# Altium PCB PCB_layout.PcbDoc
Units mil, origin at the board's own origin, x right, y up, seen from the top; angles counter-clockwise.
Board outline 3130 x 2090 mil, 2 copper layers (Top Layer, Bottom Layer); 28 components, 22 nets, 78 pads, 9 vias.
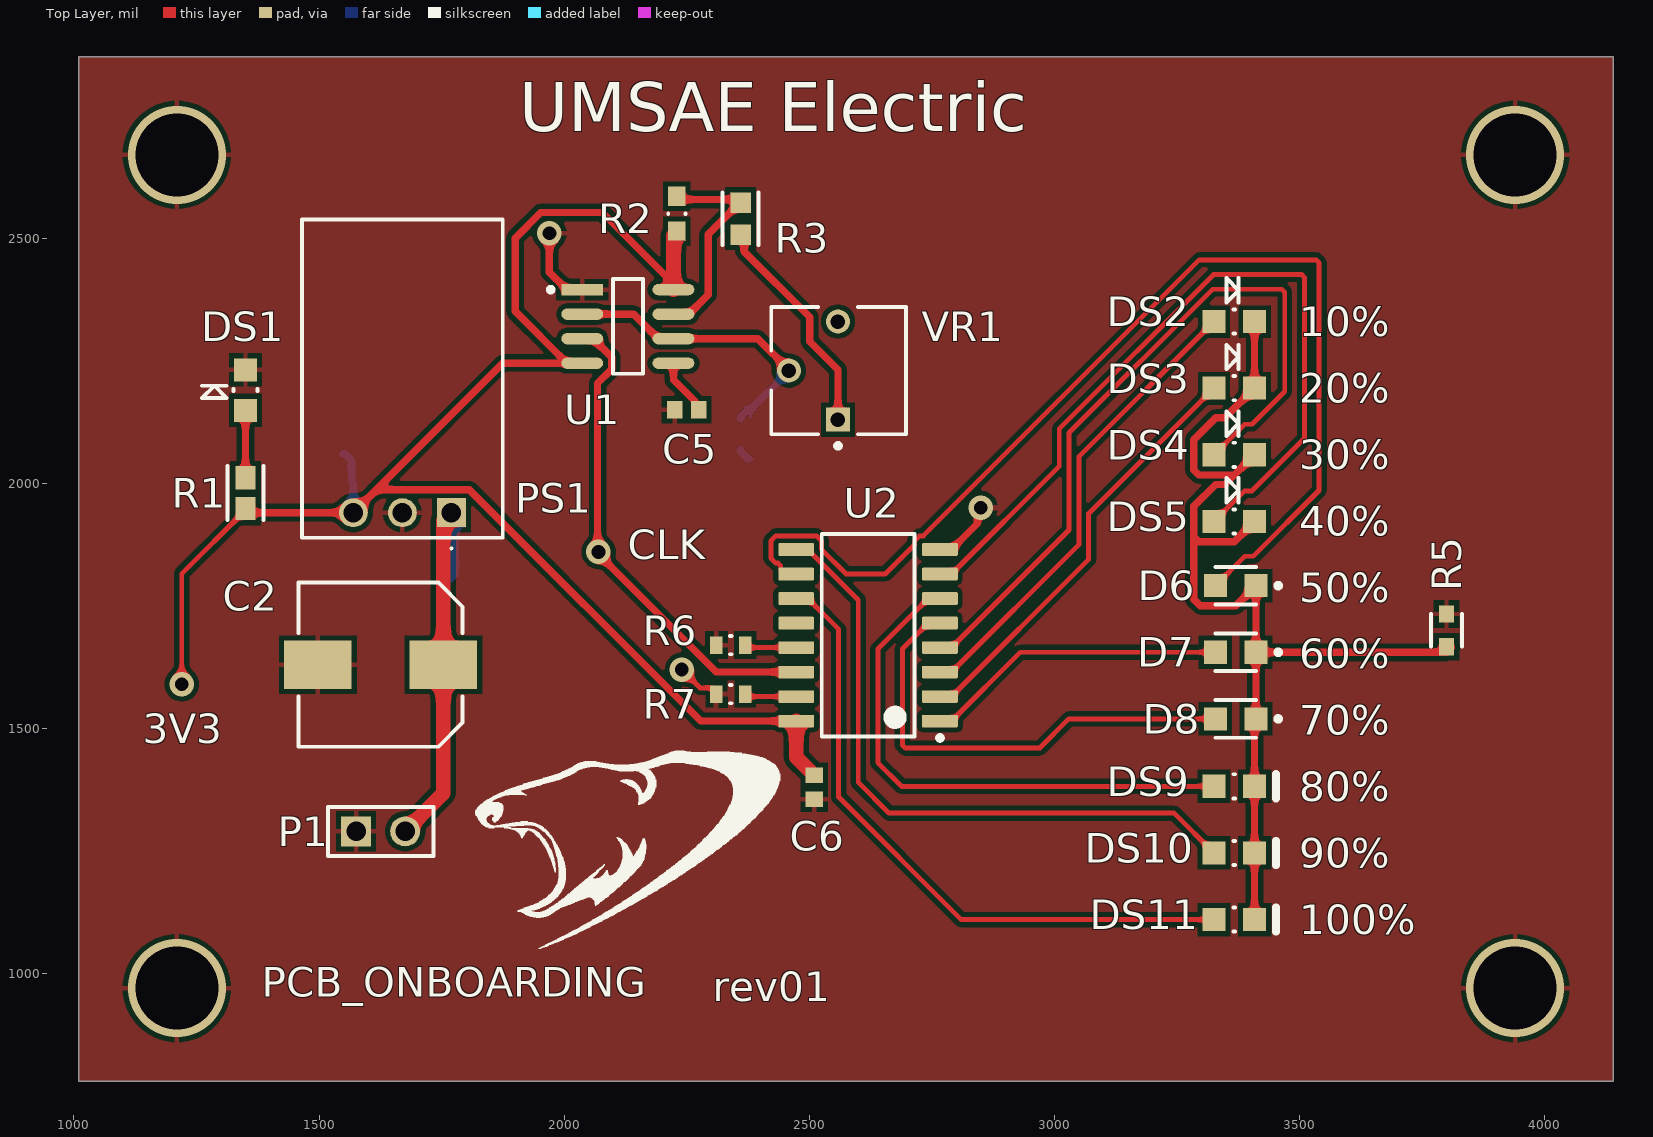
[diagram p0: Top Layer view]
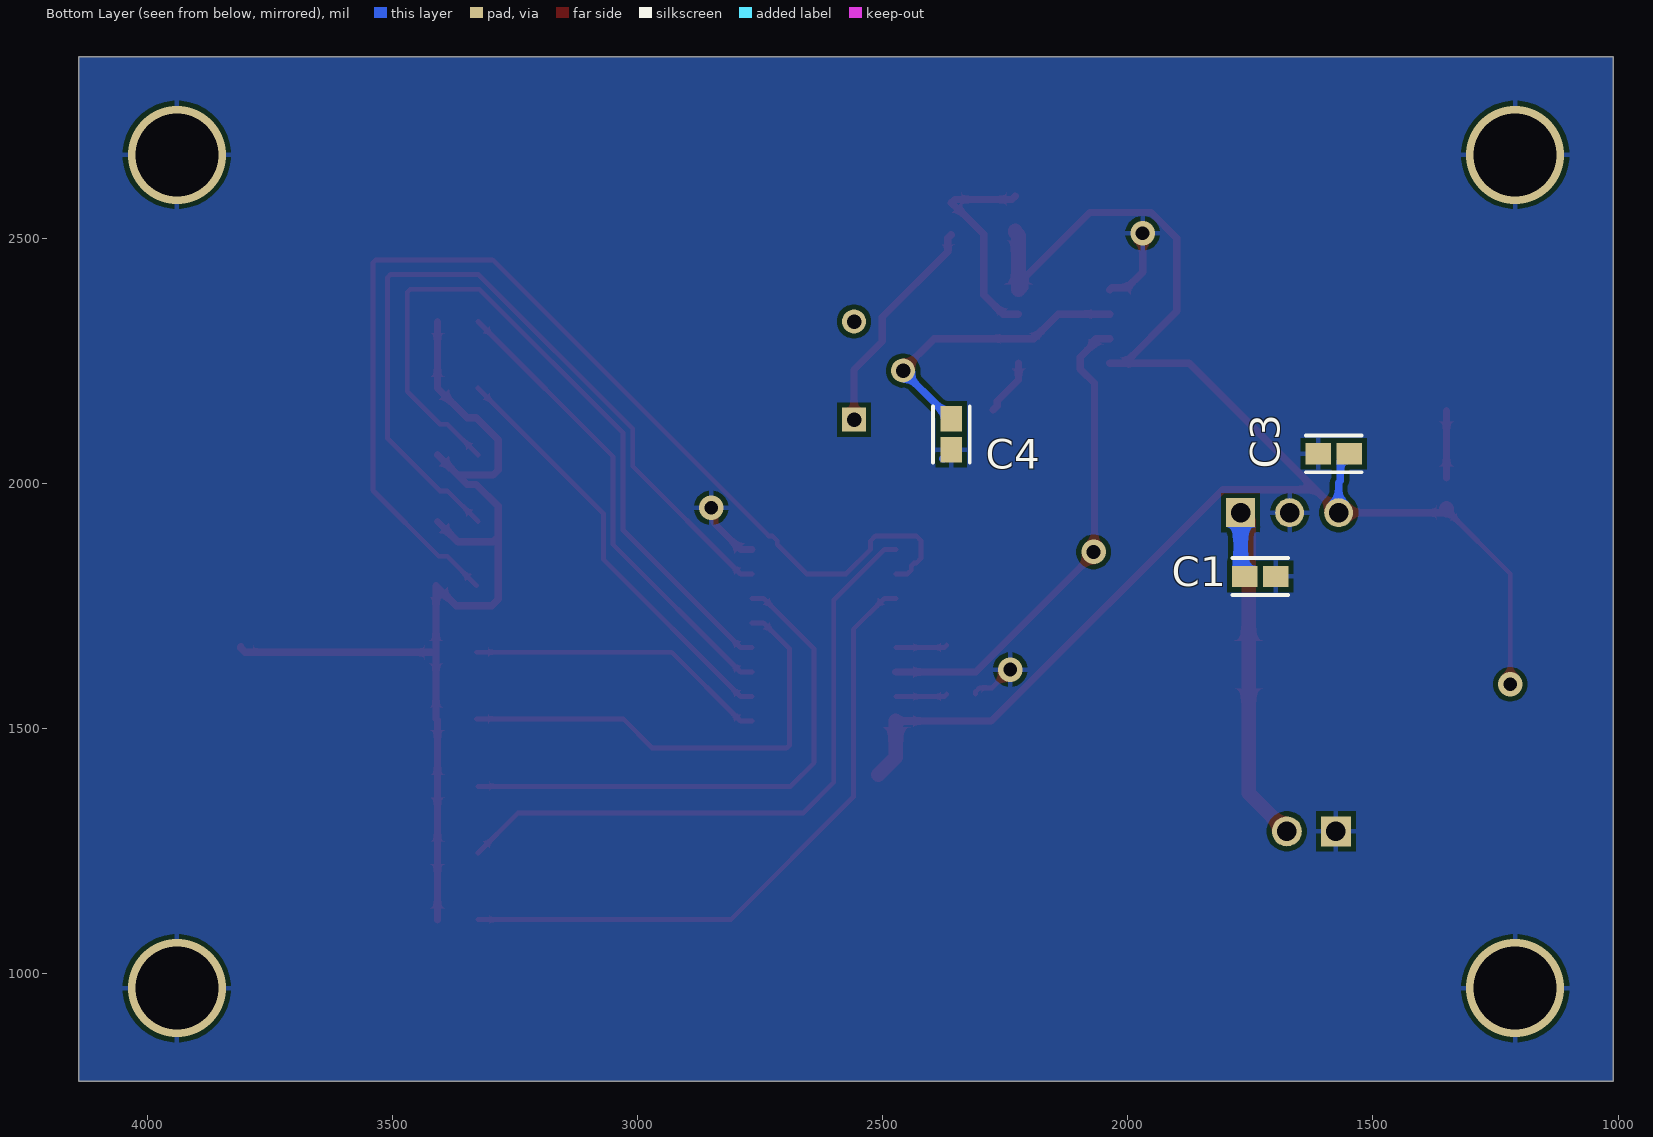
[diagram p1: Bottom Layer view, seen from below]
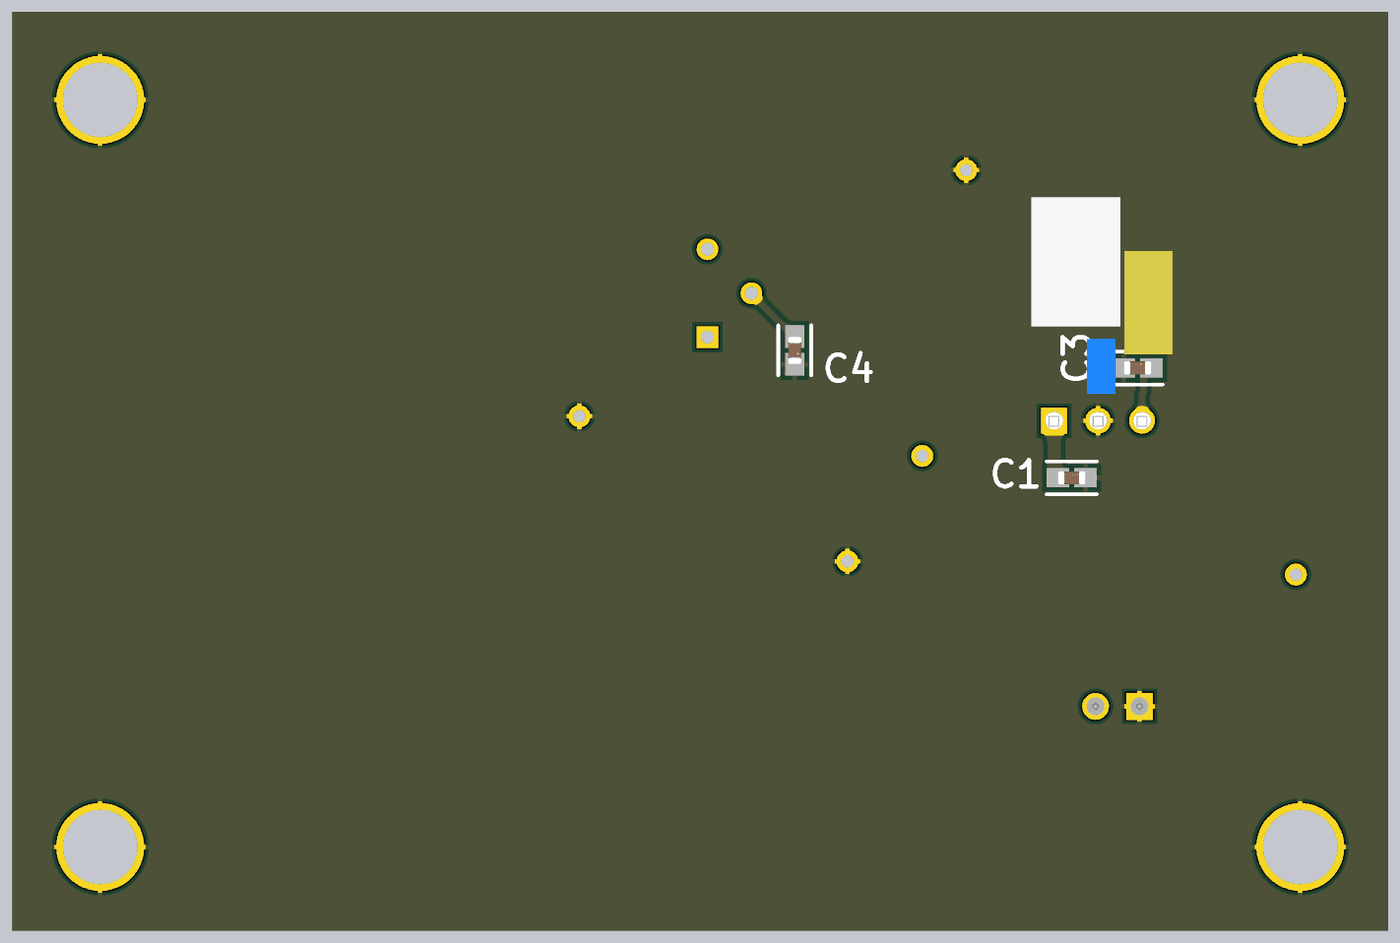
[diagram p2: 3D render of the assembled board from below, using the file's embedded part models]

## Layer stack, top to bottom
Top Solder: solder mask 0.4, Solder Resist, Dk 3.5
Top Layer: signal copper 1.4
Dielectric 1: dielectric 12.6, FR-4, Dk 4.8
Bottom Layer: signal copper 1.4
Bottom Solder: solder mask 0.4, Solder Resist, Dk 3.5

## Board outline
1010,780 4140,780 4140,2870 1010,2870

## Design rules (kind name [scope] priority, off if disabled: settings)
Clearance [All] p1: gap=10 ignorepadtopadclearanceinfootprint=FALSE
HoleSize [All] p1: absolutevalues=TRUE maxlimit=200 minlimit=1 maxpercent=80.000 minpercent=20.000
PolygonConnect [All] p1: connectstyle=Relief reliefconductorwidth=10 reliefentries=4 polygonreliefangle="90 Angle" airgapwidth=10
RoutingVias [All] p1: holewidth=28 width=50 viastyle="Through Hole" minholewidth=28 minwidth=50 maxholewidth=28 maxwidth=50
SolderMaskExpansion [All] p1: expansion=4 istentingtop=FALSE
SupplyNets "Schematic Supply Nets_2" [InNet('VCC')] p1: voltage=0.000
SupplyNets "Schematic Supply Nets_1" [InNet('GND')] p2: voltage=0.000
SupplyNets "Schematic Supply Nets" [InNet('+12')] p3: voltage=0.000
Width [All] p1: maxlimit=30 minlimit=10 preferedwidth=10 minimp=50.000000 maximp=50.000000 favimp=50.000000
29 further rules are at their usual default settings.

## Classes and differential pairs
component class Decade_counter: C4 C5 C6 D6 D7 D8 DS2 DS3 DS4 DS5 DS9 DS10 DS11 R2 R3 R5 R6 R7 U1 U2 VR1
component class Power: C1 C2 C3 DS1 P1 PS1 R1

## Components (designator, comment, footprint, x,y, rotation, side; value= is the part's Value field where it differs from the comment)
C1 "GRM188C81C106MA73J" FP-GRM188-0_2-IPC_A 1730,1810 r180 bottom
C2 "UUD1H101MNL1GS" NIC-CAPA2-8X10_V 1625.71,1630 r180 top
C3 "GRM188C81C106MA73J" FP-GRM188-0_2-IPC_A 1580,2060 r180 bottom
C4 "GRM188C81C106MA73J" FP-GRM188-0_2-IPC_A 2360,2100 r270 bottom
C5 "C0603S103K4RACTU" CAPC1608X87X35LL15T15 2250,2150 r0 top value=0.01uF
C6 "C0603S103K4RACTU" CAPC1608X87X35LL15T15 2510,1380 r90 top value=0.01uF
D6 "LTST-C170YKT" FP-LTST-C170YKT-MFG 3370,1791.21 r180 top
D7 "LTST-C170YKT" FP-LTST-C170YKT-MFG 3370,1655.28 r180 top
D8 "LTST-C170YKT" FP-LTST-C170YKT-MFG 3370,1519.36 r180 top
DS1 "LTST-C170GKT" LTST-C170GKT_V 1350,2190 r90 top
DS2 "LTST-C170GKT" LTST-C170GKT_V 3367.05,2330 r0 top
DS3 "LTST-C170GKT" LTST-C170GKT_V 3367.05,2194.07 r0 top
DS4 "LTST-C170GKT" LTST-C170GKT_V 3367.05,2058.14 r0 top
DS5 "LTST-C170GKT" LTST-C170GKT_V 3367.05,1922.22 r0 top
DS9 "LTST-C170KRKT" LTST-C170KRKT_V 3367.05,1381.85 r0 top
DS10 "LTST-C170KRKT" LTST-C170KRKT_V 3367.05,1245.93 r0 top
DS11 "LTST-C170KRKT" LTST-C170KRKT_V 3367.05,1110 r0 top
P1 "TSW-102-26-F-S" SMTC-TSW-102-26-XX-S 1575.71,1290 r0 top
PS1 "OKI-78SR-3.3_1.5-W36H-C" OKI78SR3315W36HC 1770,1940 r0 top
R1 "RMCF0603FG82R0" FP-RMCF0603-IPC_A 1350,1980 r270 top value=82R
R2 "RP73PF1J1K0BTDF" FP-RP73P-1J-MFG 2230,2550 r90 top value=1KΩ
R3 "MCT0603MD1002DP500" FP-MCT0603-IPC_A 2360,2540 r270 top
R5 "RT0603FRE07162RL" FP-RT0603-MFG 3800,1700 r90 top value=162Ω
R6 "ERJ-S030R00V" FP-ERJS03-MFG 2340,1670 r0 top
R7 "ERJ-S030R00V" FP-ERJS03-MFG 2340,1570 r0 top
U1 "TLC555CDR" FP-D0008A-IPC_B 2130,2320 r0 top
U2 "CD4017BNSR" NS0016A_M 2620,1690 r180 top
VR1 "3362P-1-104LF" BOUR-3362P 2560,2230 r90 top

## Footprints (in the part's own frame and the unit in brackets; to place one, negate y for a bottom-side part, rotate by r counter-clockwise, add the part's x,y. Pads: shape width x height; smd on the part's side, far side on the other; paste and mask are expansions set on the pad)
BOUR-3362P [mm] "THD, 3-Leads, Body 6.6x6.99mm, Pitch 2.54mm"
  rect 1.25x1.25 hole 0.75: 1(-2.54,0.035)
  round 1.25 hole 0.75: 2(0,2.575) 3(2.54,0.035)
  silkscreen extent -4.02,-3.49 3.3,3.5, body extent -3.3,-3.49 3.3,3.49, height 4.95
CAPC1608X87X35LL15T15 [mm] "Chip Capacitor, 2-Leads, Body 1.60x0.80mm, IPC High Density"
  rect 0.8x0.9 smd: 1(-0.625,0) 2(0.625,0)
  body extent -0.87,-0.48 0.87,0.48, height 0.87
FP-D0008A-IPC_B [mil]
  rect 85.4x22.92 smd paste+0 mask+0: 1(-93.06,75)
  rrect100% 85.4x22.92 smd paste+0 mask+0: 2(-93.06,25) 3(-93.06,-25) 4(-93.06,-75) 5(93.06,-75) 6(93.06,-25) 7(93.06,25) 8(93.06,75)
  silkscreen extent -162,-97 31,97, body extent -146,-106 146,106, height 10
FP-ERJS03-MFG [mm]
  rect 0.65x0.9 smd paste+0 mask+0: 1(-0.75,0) 2(0.75,0)
  silkscreen extent -0.05,-0.48 0.05,0.48, body extent -1.17,-0.58 1.17,0.58, height 0.25
FP-GRM188-0_2-IPC_A [mil]
  rect 51.38x43.55 smd paste+0 mask+0: 1(-31.52,0) 2(31.52,0)
  silkscreen extent -57,-38 57,38, body extent -31,-16 31,16, height 39
FP-LTST-C170YKT-MFG [mm]
  rect 1.2x1.2 smd paste+0 mask+0: 1(-1.05,0) 2(1.05,0)
  silkscreen extent -2.33,-0.97 1.05,0.97, body extent -1.75,-0.77 1.75,0.77, height 0.25
FP-MCT0603-IPC_A [mil]
  rect 41.88x41.82 smd paste+0 mask+0: 1(-32.65,0) 2(32.65,0)
  silkscreen extent -54,-37 54,37, body extent -73,-41 73,41, height 10
FP-RMCF0603-IPC_A [mil]
  rect 47.48x41.66 smd paste+0 mask+0: 1(-31.54,0) 2(31.54,0)
  silkscreen extent -55,-37 55,37, body extent -75,-41 75,41, height 10
FP-RP73P-1J-MFG [mm]
  rect 1x0.9 smd paste+0 mask+0: 1(-0.9,0) 2(0.9,0)
  silkscreen extent -0.03,-0.45 0.03,0.45, body extent -1.5,-0.55 1.5,0.55, height 0.25
FP-RT0603-MFG [mm]
  rect 0.9x0.8 smd paste+0 mask+0: 1(-0.85,0) 2(0.85,0)
  silkscreen extent -0.85,-0.81 0.86,0.8, body extent -1.4,-0.55 1.4,0.55, height 0.25
LTST-C170GKT_V [mm] "SMD, 2-Leads, Body 2x1.25mm"
  rect 1.2x1.2 smd: 1(-1.05,0) 2(1.05,0)
  silkscreen extent -0.41,-0.63 0.23,2.25, body extent -1,-0.63 1,0.63, height 1.1
LTST-C170KRKT_V [mm] "SMD, 2-Leads, Body 2x1.25mm"
  rect 1.2x1.2 smd: 1(-1.05,0) 2(1.05,0)
  silkscreen extent -0.05,-0.64 2.16,0.64, body extent -1,-0.63 1,0.63, height 1.2
NIC-CAPA2-8X10_V [mm] "Aluminum Electrolytic Capacitor, Diameter 8mm, Height 10.8mm, Pitch 6.5mm"
  rect 3.5x2.5 smd: 1(-3.25,0) 2(3.25,0)
  silkscreen extent -4.25,-4.25 4.25,4.25, body extent -3.99,-3.97 3.99,4, height 10.8
NS0016A_M [mm] "SOIC,16-Leads,Body 10.5x5.6mm,Pitch 1.27mm,IPC Low Density"
  rrect15% 1.85x0.65 smd: 1(-3.725,4.445) 2(-3.725,3.175) 3(-3.725,1.905) 4(-3.725,0.635) 5(-3.725,-0.635) 6(-3.725,-1.905) 7(-3.725,-3.175) 8(-3.725,-4.445) 9(3.725,-4.445) 10(3.725,-3.175) 11(3.725,-1.905) 12(3.725,-0.635) 13(3.725,0.635) 14(3.725,1.905) 15(3.725,3.175) 16(3.725,4.445)
  silkscreen extent -3.85,-5.25 2.4,5.44, body extent -2.8,-5.25 2.8,5.25, height 2
OKI78SR3315W36HC [mm]
  rect 1.5x1.5 hole 1: 1(0,0)
  round 1.5 hole 1: 2(-2.54,0) 3(-5.08,0)
  silkscreen extent -7.74,-1.9 2.66,15.2, body extent -7.74,-1.31 2.67,15.2, height 11.48
SMTC-TSW-102-26-XX-S [mm] ".025 SQ Post Terminal Strip Assembly, 1x2 Pins, Vertical, 2.54mm Pitch, Male"
  rect 1.55x1.55 hole 1.02: 1(0,0)
  round 1.55 hole 1.02: 2(2.54,0)
  silkscreen extent -1.46,-1.27 4,1.27, body extent -1.4,-1.27 3.81,1.27, height 8.38

## Part data
C1 C3 C4: library part CMP-06035-041220-1, "Chip Multilayer Ceramic Capacitors for General Purpose, 0603, 10uF, X6S, 22%, 20%, 16V", Capacitance=10uF, Case/Package=0603, Dielectric=X6S, Max Operating Temperature=105°C, Min Operating Temperature=-55°C, Package Quantity=10000, Tolerance=20%, Voltage Rating=16V, Length=0.063inch, Mount="Surface Mount", Packaging="Tape and Reel", Thickness=0.039inch, Voltage Rating (DC)=16V, Weight=0.000222oz, Width=0.031inch
C2: library part CMP-0687-00073-1, "Aluminum Electrolytic Capacitor, UD Series, Low Impedance, 100 uF, 50 V, + / - 20%, -55 to 105 degC, Chip Type, 8 x 10 mm D x L, Pb-Free, Reel", Capacitance=100µF, ESR (Equivalent Series Resistance)=-, Lifetime @ Temp.="5000 Hrs @ 105°C", Manufacturer=Nichicon, Operating Temperature="-55°C ~ 105°C", Package / Case="Radial, Can - SMD", Rated Capacitance="100 uF", Rated Ripple Current (at 100kHz)="300 mA", Rated Voltage="50 V", Ripple Current=300mA, Supplier Part Number 1=493-2306-1-ND, Tolerance=±20%, Tolerance Rated Capacitance="-20 to 20%", Voltage Rating=50V, Applications="General Purpose", Category=Capacitors, ComponentLink1Description="Manufacturer URL", ComponentLink1URL=http://www.nichicon.co.jp/, ComponentLink2Description=Datasheet, ComponentLink2URL=http://products.nichicon.co.jp/en/pdf/XJA043/e-ud.pdf, ComponentLink3Description="Package Specification", ComponentLink3URL=http://products.nichicon.co.jp/en/pdf/XJA043/e-ud.pdf, ComponentLink4Description=http://nichicon-us.com/english/products/pdfs/e-uud.pdf, ComponentLink4URL=http://nichicon-us.com/english/products/pdfs/e-uud.pdf, DatasheetVersion=08/2012, Diameter="8 mm", Endurance Time="5000 h", Height - Seated (Max)="0.394\" (10.00mm)", Impedance="0.34 Ohm", Lead Spacing=-, Length="10 mm", Manufacturer Part Number=UUD1H101MNL1GS, Mounting Technology="Surface Mount", Mounting Type="Surface Mount", PackageDescription="2-Pin Surface Mount Device, Diameter 8 mm, Height 10 mm, Pitch 6.5 mm", PackageReference=CAPAE-D8H10, Packaging="Cut Tape (CT)", Packing="Dia382mm Reel", Part Status=Active, PartNumber=UUD1H101MNL1GS, Polarization=Polar, Pricing 1="1=0.92, 10=0.685, 25=0.5868, 50=0.5478, 100=0.4696, 250=0.43044 (CAD)", RoHS=TRUE, Size / Dimension="0.315\" Dia (8.00mm)", Stock 1=65948, Supplier 1=Digi-Key, Surface Mount Land Size="0.327\" L x 0.327\" W (8.30mm x 8.30mm)"
C5 C6: library part CMP-2006-03842-1, Manufacturer=Kemet, Part Number=C0603S103K4RACTU
D6 D7 D8: library part CMP-1674-00003-7, "LED YELLOW CLEAR SMD", Case Code (Imperial)=0805, Case Code (Metric)=2012, Color=Yellow, Forward Current=20mA, Forward Voltage=2.1V, Lens Color=Colorless, Max Operating Temperature=85°C, Min Operating Temperature=-55°C, Package Quantity=1, Power Dissipation=60mW, Reverse Voltage=5V, Test Current=10mA, Case/Package=0805, Depth=1.6mm, Dominant Wavelength=588nm, Height=1.1mm, Illumination Color=Yellow, Lead Free="Lead Free", Length=3.2mm, Lens Style=Diffused, Lens Transparency=Clear, Luminous Intensity=6mcd, Mount="Surface Mount", Number of Elements=1, Number of LEDs=1, Number of Pins=2, Packaging="Tape and Reel", Power Rating=60mW, Radiation Hardening=No, RoHS Compliant=Yes, Series="CHIPLED 0805", Viewing Angle=130°, Wavelength=585nm, Width=1.25mm
DS1 DS2 DS3 DS4 DS5: library part CMP-1674-00002-5, "LED Uni-Color Green, 100 mW, 120 mA, -55 to 85 degC, 2-Pin SMD, RoHS, Tape and Reel", Color=Green, Current - Test=10mA, Lens Color=Colorless, Manufacturer=Lite-On, Max Operating Temperature="85 degC", Millicandela Rating=6mcd, Min Operating Temperature="-55 degC", Package / Case="0805 (2012 Metric)", Package Quantity=1, Supplier Device Package=-, Supplier Part Number 1=160-1179-1-ND, Voltage - Forward (Vf) (Typ)=2.1V, Category=Optoelectronics, Colour=Green, ComponentLink1Description="Manufacturer URL", ComponentLink1URL=http://www.us.liteon.com/, ComponentLink2Description=Datasheet, ComponentLink2URL=http://media.digikey.com/pdf/Data%20Sheets/Lite-On%20PDFs/LTST-C170GKT.pdf, DatasheetVersion=03/2003, Features=-, Height="1.1 mm", Height (Max)=1.10mm, Length="2 mm", Lens Style/Size="Rectangle with Flat Top, 1.40mm x 1.25mm", Lens Transparency=Clear, Manufacturer Part Number=LTST-C170GKT, Mount="Surface Mount", Mounting Technology="Surface Mount", Mounting Type="Surface Mount", PackageDescription="2-Pin Surface Mount Device, Body 2 x 1.25 mm", PackageReference=C170GKT, Packaging="Tape and Reel", Part Status=Active, Pins=2, Pricing 1="1=0.48, 10=0.351, 25=0.2588, 100=0.1848, 250=0.12564, 500=0.11086, 1000=0.08684 (CAD)", RoHS="RoHS Compliant", RoHSCompliant=true, Size / Dimension="2.00mm L x 1.25mm W", Stock 1=242288, Supplier 1=Digi-Key, Viewing Angle=130°, Wavelength - Dominant=569nm, Wavelength - Peak=565nm
DS9 DS10 DS11: library part CMP-2000-07593-1, "LED Red, 75 mW, 54 mcd, -55 to 85 degC, 2-Pin SMD, RoHS, Tape and Reel", Case Code (Imperial)=0805, Case Code (Metric)=2012, Colour=Red, Forward Current=30mA, Forward Voltage=2V, Lens Colour=Colorless, Manufacturer=Lite-On, Max Operating Temperature=85degC, Min Operating Temperature=-55degC, Package Description="2-Pin Surface Mount Device, Body 2 x 1.25 mm", Package Quantity=1, Package Reference=C170KRKT, Power Dissipation=75mW, Test Current=20mA, Case\/Package=0805, Datasheet URL=http://optoelectronics.liteon.com/upload/download/DS-22-99-0150/LTST-C170KRKT.pdf, Datasheet Version="Rev. D, 11/2014", Depth=1.6mm, Dominant Wavelength=631nm, Height=1.1mm, Illumination Colour=Red, Lead Free=LeadFree, Length=3.2mm, Lens Style=Rectangular, Lens Transparency=Clear, Luminous Intensity=54mcd, Manufacturer URL=http://www.us.liteon.com/, Mount=SurfaceMount, Mounting Technology=SurfaceMount, Number of Elements=1, Number of LEDs=1, Number of Pins=2, Packaging=TapeandReel, Power Rating=75mW, Radiation Hardening=No, RoHSCompliant=True, Viewing Angle=130degrees, Wavelength=639nm, Width=1.25mm
P1: library part CMP-1024-00329-1, "0.025\" SQ Post Header, Through-hole, Vertical, -55 to 125 degC, 2.54 mm Pitch, 2-Pin, Male, RoHS", Manufacturer=Samtec, Temperature Range="-55 to 125 degC", ComponentLink1Description="Manufacturer URL", ComponentLink1URL=http://www.samtec.com, ComponentLink2Description=Datasheet, ComponentLink2URL=http://www.samtec.com/documents/webfiles/pdf/TSW_TH.PDF, ComponentLink3Description="Package Specification", ComponentLink3URL=http://www.samtec.com/documents/webfiles/cpdf/TSW-XXX-XX-XXX-X-XX-XXX-MKT.pdf, DatasheetVersion=F-214, Mounting Technology=Through-hole, Orientation=Vertical, PackageDescription=".025[0.64] SQ. Post Terminal Strip Assembly", PackageReference=TSW-102-26-XX-S, PackageVersion="DM, 8/1988", PartNumber=TSW-102-26-F-S, Pitch="2.54 mm", RoHS=True
PS1: "Power Supply", Arrow Part Number=OKI-78SR-3.3/1.5-W36H-C, Manufacturer_Name="Murata Electronics", Mouser Part Number=580-OKI78SR3.31.5WHC, Arrow Price/Stock=https://www.arrow.com/en/products/oki-78sr-3.31.5-w36h-c/murata-power-solutions?utm_currency=USD&region=nac, Datasheet Link=https://www.murata.com/products/productdata/8807037992990/oki-78sr.pdf?1675222286000, Height=8.6mm, Manufacturer_Part_Number=OKI-78SR-3.3/1.5-W36H-C, Mouser Price/Stock=https://www.mouser.co.uk/ProductDetail/Murata-Power-Solutions/OKI-78SR-3.3-1.5-W36H-C?qs=2QmwSASSNhasLT4%252BJlpIag%3D%3D
R1: library part CMP-26527-007395-1, "82Ω ±1% 0.1W 0603 Thick Film Chip Resistor AEC-Q200 compliant", RoHS Compliant=Yes
R2: library part CMP-03211-004517-1, "RES SMD 1K OHM 0.1% 1/6W 0603", Manufacturer="TE Connectivity", Package=RP73P-1J, Power Rating=0.166W, Resistance=1KΩ, Temperature="-55°C to +155°C", Temperature Coefficient=25ppm/°C, Temperature Range High=+155°C, Temperature Range Low=-55°C, Tolerance=0.001, Voltage Rating=100V, Automotive=No, Category=Res, ComponentLink2Description=Datasheet, ComponentLink2URL=https://www.te.com/commerce/DocumentDelivery/DDEController?Action=srchrtrv&DocNm=1773272&DocType=DS&DocLang=English, Composition="Thin Film", Device Class L1="Passive Components", Device Class L2=Resistors, Device Class L3="Chip SMD Resistors", Digikey Description="RES SMD 1K OHM 0.1% 1/6W 0603", Height=0.55mm, Ipc Land Pattern Name=RESC15580X45, Lead Free=Yes, Manufacturer Part Number=RP73PF1J1K0BTDF, Octopart=https://octopart.com/rp73pf1j1k0btdf-te+connectivity-45465729, RoHS=TRUE, Series=RP73P
R3: library part CMP-02407-010942-1, "RES SMD 100 OHM 1% 1/8W 0603", Case Code (Imperial)=0603, Case Code (Metric)=1608, Max Operating Temperature=175°C, Max Power Dissipation=150mW, Min Operating Temperature=-55°C, Package Quantity=1, Power Rating=125mW, Resistance=10kR, Temperature Coefficient=25ppm/°C, Tolerance=0.5%, Voltage Rating=75V, Case/Package=0603, Composition="Thin Film", Contact Plating=Tin, Depth=0.85mm, Features="Automotive AEC-Q200", Height=0.022inch, Lead Free="Lead Free", Length=1.55mm, Military Standard=Not, Mount="Surface Mount", Number of Terminations=2, Packaging="Tape and Reel", REACH SVHC="No SVHC", Termination=Wraparound, Voltage Rating (DC)=75V, Width=0.8mm
R5: library part CMP-03412-027968-1, "RES SMD 162 OHM 1% 1/10W 0603", Manufacturer=Yageo, Package=RT0603, Power Rating=0.1W, Resistance=162Ω, Temperature="-55°C to +155°C", Temperature Coefficient="50 ppm/°C", Temperature Range High=+155°C, Temperature Range Low=-55°C, Tolerance=0.01, Voltage Rating=75V, Automotive=No, Category=Res, ComponentLink2Description=Datasheet, ComponentLink2URL=http://www.yageo.com/documents/recent/PYu-RT_1-to-0.01_RoHS_L_9.pdf, Composition="Thin Film", Device Class L1="Passive Components", Device Class L2=Resistors, Device Class L3="Chip SMD Resistors", Digikey Description="RES SMD 162 OHM 1% 1/10W 0603", Footprint Url=http://www.yageo.com/exep/pages/download/literatures/PYu-R_Mount_10.pdf, Height=0.55mm, Ipc Land Pattern Name=RESC16080X45, Lead Free=Yes, Manufacturer Part Number=RT0603FRE07162RL, Mouser Description="Thin Film Resistors - SMD 1/10W 162 ohm 1% 50ppm", Octopart=https://octopart.com/rt0603fre07162rl-yageo-1483634, RoHS=TRUE, Series=RT
R6 R7: library part CMP-00287-39831190-1, "ERJ-S030R00V Zero Ohm Resistor, Jumper, 0603 [1608 Metric], Thick Film, 100 mW, 1 A, Surface Mount", Case Code (Imperial)=0603, Case Code (Metric)=1608, Max Operating Temperature=155°C, Max Power Dissipation=100mW, Min Operating Temperature=-55°C, Resistance=0Ω, Temperature Coefficient=100ppm/°C, Tolerance=5%, Voltage Rating (DC)=100V, Case/Package=0603, Composition="Thick Film", Contact Plating=Tin, Depth=800µm, Features=Anti-Sulfur, Height=558.8µm, Lead Free="Lead Free", Length=1.6mm, Lifecycle Status=Production, Military Standard=Not, Mount="Surface Mount", NexarPartId=39831190, Number of Terminations=2, Power Rating=100mW, RoHS=Compliant, Width=800µm
U1: library part CMP-04857-000001-1, "IC OSC SGL TIMER 2.1MHZ 8-SOIC", Case/Package=SOIC, Current Rating=250A, Frequency=2.1MHz, High Level Output Current=-10mA, Low Level Output Current=100mA, Max Operating Temperature=125°C, Max Power Dissipation=725mW, Max Supply Voltage=15V, Min Operating Temperature=-40°C, Min Supply Voltage=2V, Operating Supply Current=360uA, Package Quantity=2500, Quiescent Current=250uA, Height=1.58mm, Lead Free="Lead Free", Length=4.9mm, Mount="Surface Mount", Number of Channels=1, Number of Pins=8, Number of Timers/Counters=1, Packaging="Tape and Reel", Power Dissipation=725mW, Radiation Hardening=No, REACH SVHC="No SVHC", Termination=SMD/SMT, Weight=0.002561oz, Width=3.91mm
U2: library part CMP-1623-00606-2, "CMOS Decade Counter with 10 Decoded Outputs, NS0016A, LARGE T&R", F @ Nom Voltage(Max)(Mhz)=8, Generic Part Number=CD4017B, ICC @ Nom Voltage(Max)(mA)=0.03, Manufacturer="Texas Instruments", Operating Temperature Range(C)="-55 to 125", Rating=Military, tpd @ Nom Voltage(Max)(ns)=270, Voltage(Nom)(V)=10, Bits(#)=10, DatasheetVersion=SCHS027C, Function=Counter, Input Type=CMOS, Inputs=1, Output Drive (IOL/IOH)(Max)(mA)=1.5/-1.5, Output Type=CMOS, PackageReference=NS0016A, Schmitt Trigger=No, Technology Family=CD4000, Type=Decade, VCC(Max)(V)=18, VCC(Min)(V)=3
VR1: library part CMP-1747-00003-1, "Square Trimpot(R) Trimming Potentiometer, 100 KOhm, 300 V, -55 to 125 degC, 3-Pin THD, RoHS, Tube", Case\Package=Axial, Max Operating Temperature="155 degC", Min Operating Temperature="-55 degC", Package Quantity=200, Power Rating="250 mW", Resistance="1 mohm", Tolerance=1%, Voltage Rating="250 V", ComponentLink1Description="Manufacturer URL", ComponentLink1URL=http://www.bourns.com/, ComponentLink2Description=Datasheet, ComponentLink2URL=http://www.bourns.com/docs/Product-Datasheets/3362.pdf, DatasheetVersion=May-16, Length="0.248 inch", Mount="Through Hole", PackageDescription="3-Pin Through Hole Device, Body 6.6 x 6.99 mm, Pitch 2.54 mm", PackageReference=3326P, Packaging=Bulk, RoHSCompliant=true

## Via types
v1: diameter 50, hole 28, Top Layer to Bottom Layer, 5 vias
v2: diameter 200, hole 169.29, Top Layer to Bottom Layer, 4 vias

## Nets (pads, with @x,y where several pads share a name; then routed paths per layer and width w, separated by ;. In a path a pad name is that pad's centre, name@x,y a point inside that pad or via, vN(x,y) a via of type N, cw(c..) or ccw(c..) an arc to the next point about the centre after c; other vN are vias at no path point)
+12: C1.1 C2.1 P1.2 PS1.1 | length 823.6
  Top Layer w30: P1.2 1753.66,1367.95 C2.1 1753.66,1923.66 PS1.1
  Bottom Layer w30: C1.1 1763.22,1810 1770,1816.78 PS1.1
GND: C1.2 C2.2 C3.1 C4.2 C5.1 C6.1 DS1.2 P1.1 PS1.2 R5.2 R6.1 R7.1 U1.1 U2.8 | length 416.5
  Top Layer w10: v1(2240,1620) 2277.28,1582.72 2302.68,1582.72 2310.47,1574.92 R7.1
  Top Layer w15: v1(1970,2510) 1970,2430.7 2001.74,2398.96 2032.99,2398.96 U1.1 ; U2.8 2790.28,1865 2843.3,1918.03 2843.3,1943.3 v1(2850,1950)
  Bottom Layer w15: C4.2 2360,2064.57 2374.28,2050.29 C4.2@2378.19,2050.29
  other v2: 1210,970 3940,970 1210,2670 3940,2670
NetC4_1: C4.1 U1.2 U1.6 VR1.2 | length 613.8
  Top Layer w15: U1.2 2141.81,2345 2191.81,2295 U1.6 2395,2295 VR1.2@2460,2230
  Bottom Layer w15: C4.1 2360,2135.43 2374.28,2149.71 2379.71,2149.71 VR1.2@2460,2230
NetC5_2: C5.2 U1.5 | length 116.4
  Top Layer w15: U1.5 2223.06,2211.04 2266.36,2167.74 2266.36,2158.25 C5.2
NetD6_1: D6.1 D7.1 D8.1 DS2.2 DS3.2 DS4.2 DS5.2 DS9.2 DS10.2 DS11.2 R5.1 | length 2190.3
  Top Layer w15: DS11.2 DS10.2 DS9.2 3408.39,1516.4 D8.1 D7.1 ; DS5.2 3367.26,1881.1 3294.84,1881.1 3284.59,1891.35 ; DS4.2 3367.26,2017.02 ; DS2.2 DS3.2 3347.8,2133.48 3329.05,2133.48 3284.59,2089.02 3284.59,2027.27 3294.84,2017.02 3367.26,2017.02 ; R5.1@3810,1666.54 3810,1664.57 3800.72,1655.28 D7.1 ; 3284.59,1891.35 3284.59,1763.29 3297.79,1750.09 3370.22,1750.09 D6.1 D7.1 ; 3284.59,1891.35 3284.59,1953.09 3329.05,1997.56 3347.8,1997.56 3367.26,2017.02
NetD6_2: D6.2 U2.10 | length 2298.8
  Top Layer w10: U2.10 2449.72,1815 2441.93,1822.8 2441.93,1831.35 2436.07,1837.2 2431.84,1837.2 2421.93,1847.12 2421.93,1882.88 2431.84,1892.8 2514.85,1892.8 2524.76,1882.88 2524.76,1865.49 2575.25,1815 2655,1815 2715.24,1875.24 2715.24,1882.88 2725.15,1892.8 2732.8,1892.8 3295.86,2455.86 3534.14,2455.86 3540,2450 3540,1985.37 3405.73,1851.11 3388.56,1851.11 D6.2
NetD7_2: D7.2 U2.1 | length 620.1
  Top Layer w10: U2.1 2790.28,1515 2930.56,1655.28 D7.2
NetD8_2: D8.2 U2.5 | length 960.4
  Top Layer w10: U2.5 2743.03,1715 2690,1661.97 2690,1465.86 2695.86,1460 2970.34,1460 3029.7,1519.36 D8.2
NetDS1_1: DS1.1 R1.1 | length 137.1
  Top Layer w15: R1.1 DS1.1
NetDS2_1: DS2.1 U2.3 | length 960.4
  Top Layer w10: U2.3 2790.28,1615 3050,1874.72 3050,2054.29 DS2.1
NetDS3_1: DS3.1 U2.2 | length 874.5
  Top Layer w10: U2.2 2790.28,1565 3070,1844.72 3070,1938.36 DS3.1
NetDS4_1: DS4.1 U2.4 | length 1525
  Top Layer w10: U2.4 2790.28,1665 3030,1904.72 3030,2102.75 3323.11,2395.86 3464.14,2395.86 3470,2390 3470,2187.23 3403.27,2120.5 3388.07,2120.5 DS4.1
NetDS5_1: DS5.1 U2.7 | length 1626.5
  Top Layer w10: U2.7 2790.28,1815 3010,2034.72 3010,2111.03 3324.83,2425.86 3504.14,2425.86 3510,2420 3510,2091.3 3403.27,1984.57 3388.07,1984.57 DS5.1
NetDS9_1: DS9.1 U2.6 | length 1107
  Top Layer w10: U2.6 2743.03,1765 2640,1661.97 2640,1430 2688.15,1381.85 DS9.1
NetDS10_1: DS10.1 U2.9 | length 1326.7
  Top Layer w10: U2.9 2496.97,1865 2600,1761.97 2600,1390 2662.73,1327.27 3244.36,1327.27 DS10.1
NetDS11_1: DS11.1 U2.11 | length 1324
  Top Layer w10: U2.11 2496.97,1765 2560,1701.97 2560,1360 2810,1110 DS11.1
NetR2_2: R2.2 R3.1 U1.7 | length 438.7
  Top Layer w15: U1.7 2254.3,2345 2293.83,2384.53 2293.83,2507.77 2345.27,2559.21 2346.59,2559.21 R3.1@2360,2572.62 ; R2.2 2236.39,2579.04 2353.61,2579.04 R3.1
NetR3_2: R3.2 VR1.1 | length 459.6
  Top Layer w15: R3.2 2367.31,2500.04 2367.31,2472.69 2500.73,2339.27 2500.73,2289.27 2558.62,2231.38 VR1.1
NetR6_2: R6.2 U2.13 | length 105.9
  Top Layer w10: R6.2 2374.53,1665 U2.13
NetR7_2: R7.2 U2.15 | length 105.9
  Top Layer w10: R7.2 2374.53,1565 U2.15
NetU1_3: U1.3 U2.14 | length 997.4
  Top Layer w15: U1.3 2066.04,2295 2069.7,2291.34 2069.7,2284.44 2097.14,2257 2097.14,2233 2068.19,2204.05 2068.19,1857.03 2310.21,1615 U2.14
  other v1: 2070,1860
VCC: C3.2 C6.2 PS1.3 R1.2 R2.1 U1.4 U1.8 U2.16 | length 3371.9
  Top Layer w10: v1(1220,1590) 1220,1815.55 R1.2@1350,1945.55
  Top Layer w15: R1.2@1355.83,1940 PS1.3 1617.03,1987.03 ; U1.4 U1.4@2005.7,2245 ; U1.8 2213.49,2395 2209.83,2398.66 2209.83,2420.17 2077.5,2552.5 1952.4,2552.5 1900,2500.1 1900,2350.7 U1.4@2005.7,2245 ; U2.16 2278.8,1515 1806.78,1987.03 1617.03,1987.03 ; C6.2@2509.02,1405.59 C6.2@2510,1405.59 ; 1617.03,1987.03 1875,2245 U1.4@2005.7,2245
  Top Layer w30: R1.2@1350,1945.55 R1.2 ; U1.8 2223.06,2505.65 2230,2512.6 R2.1 ; U2.16 2473.35,1441.26 C6.2@2509.02,1405.59
  Bottom Layer w15: C3.2 1552.4,2060 1566.67,2045.72 1566.67,2004.7 1570,2001.37 PS1.3
pads on no net: U2.12 VR1.3

## Polygon pours and split planes (outlines as drawn)
GND on Bottom Layer "GND_L02_P001" (solid, pour order 1): 1010,2870 4140,2870 4140,780 1010,780
GND on Top Layer "GND_L01_P000" (solid, pour order 0): 4140,2870 4140,780 1010,780 1010,2870

## Silkscreen, mask and mechanical layers (free items; w line width, h text height)
Top Overlay:
  region: 6050 vertices and 0 holes, not listed, extent 1819.1,1050.48 2440.42,1454.34
  text "UMSAE Electric" at 1908,2718 h100
  text "10%" at 3500,2300 h60
  text "20%" at 3500,2164.44 h60
  text "30%" at 3500,2028.89 h60
  text "40%" at 3500,1893.33 h60
  text "CLK" at 2130,1845 h60
  text "50%" at 3500,1757.78 h60
  text "60%" at 3500,1622.22 h60
  text "70%" at 3500,1486.67 h60
  text "3V3" at 1140.03,1470 h60
  text "80%" at 3500,1351.11 h60
  text "90%" at 3500,1215.56 h60
  text "100%" at 3500,1080 h60
  text "PCB_ONBOARDING" at 1383,953 h60
  text "rev01" at 2303,943 h60